# Altium PCB PCB1.PcbDoc
Units mil, origin at the board's own origin, x right, y up, seen from the top; angles counter-clockwise.
Board outline 2000 x 1000 mil, 2 copper layers (Top Layer, Bottom Layer); 12 components, 11 nets, 60 pads, 1 vias.
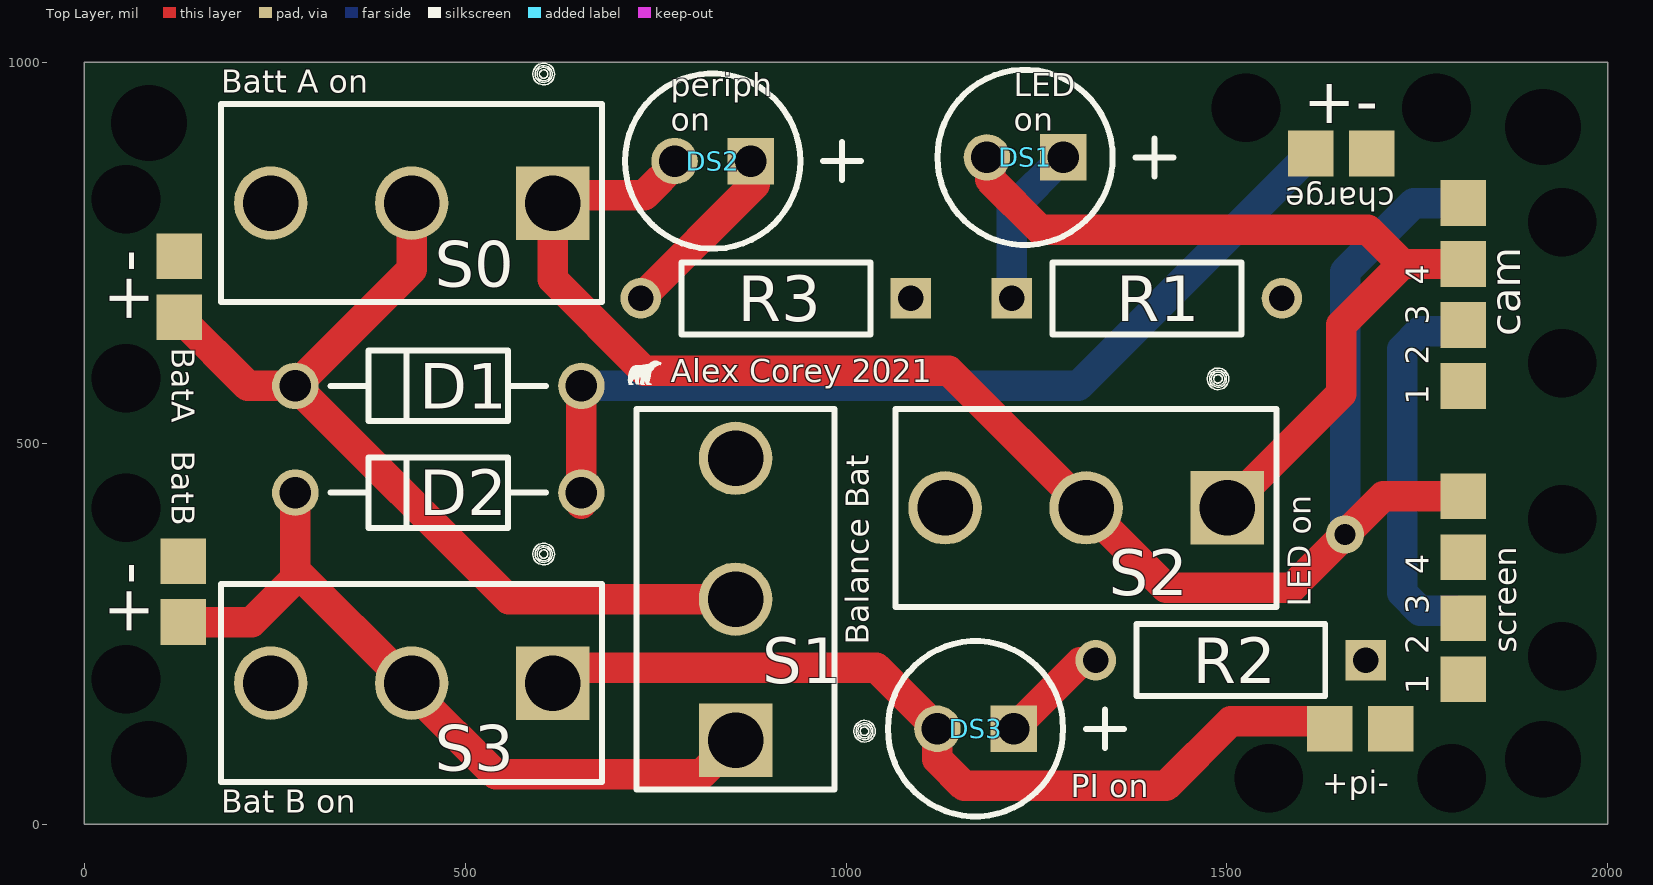
[diagram p0: Top Layer view]
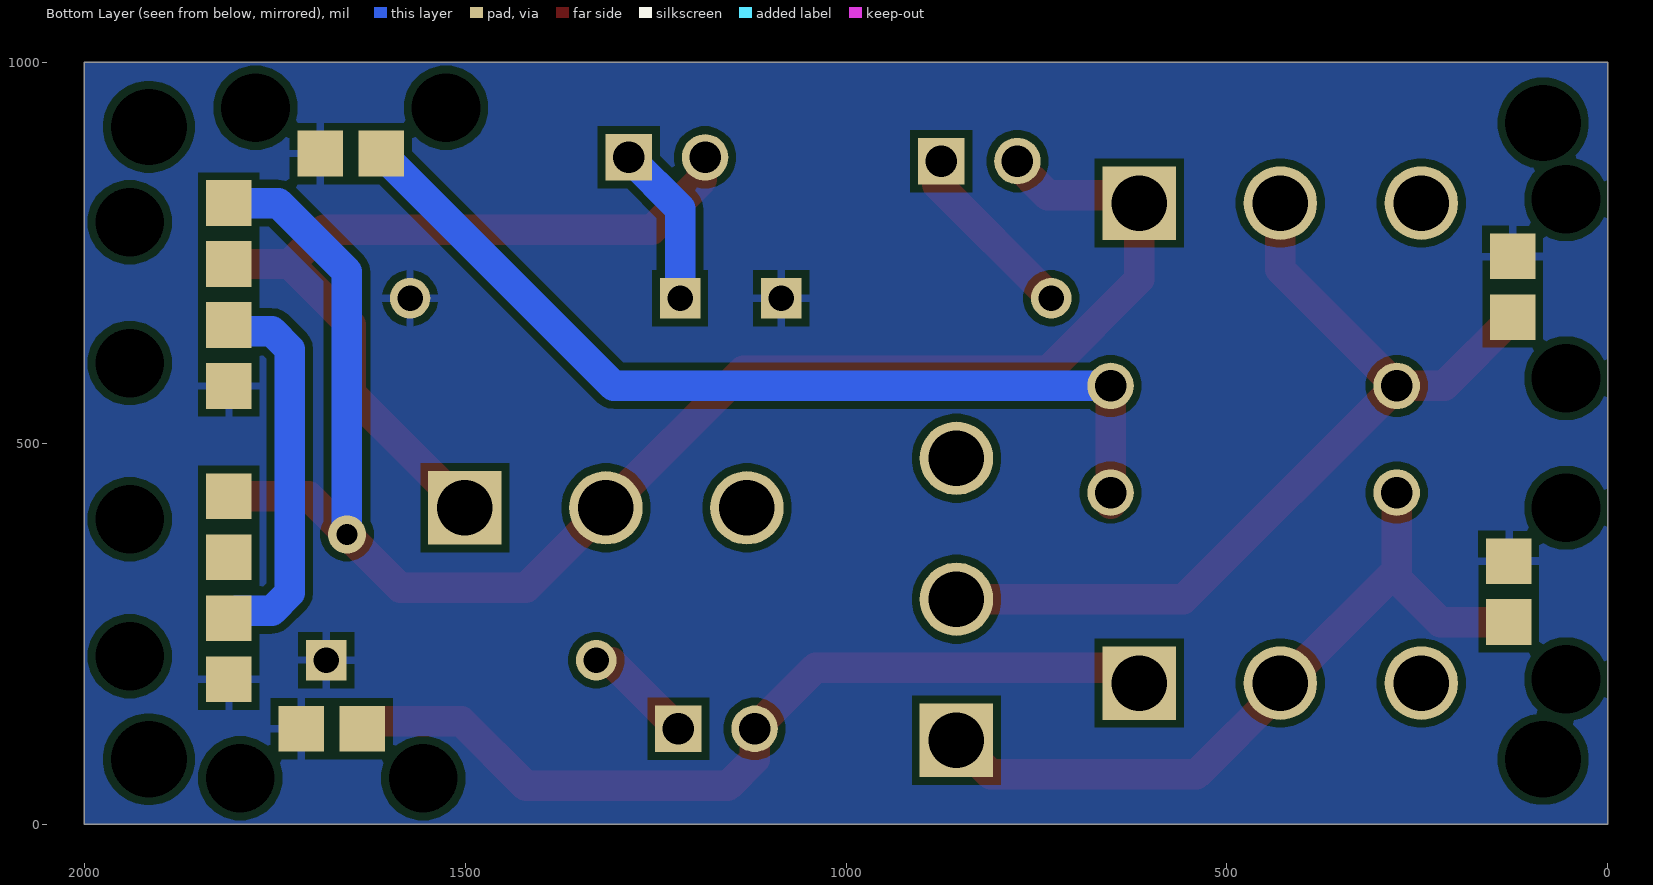
[diagram p1: Bottom Layer view, seen from below]

## Layer stack, top to bottom
Top Solder: solder mask 0.4, Solder Resist, Dk 3.5
Top Layer: signal copper 1.4
Dielectric 1: dielectric 12.6, FR-4, Dk 4.8
Bottom Layer: signal copper 1.4
Bottom Solder: solder mask 0.4, Solder Resist, Dk 3.5

## Board outline
0,0 0,1000 2000,1000 2000,0

## Design rules (kind name [scope] priority, off if disabled: settings)
Clearance [All] p1: gap=10 ignorepadtopadclearanceinfootprint=FALSE except(0: Arc-Hole Track-Hole SMDPad-Hole THPad-Hole Via-Hole Fill-Hole Poly-Hole Region-Hole Text-Hole)
PolygonConnect [All] p1: connectstyle=Relief reliefconductorwidth=10 reliefentries=4 polygonreliefangle="90 Angle" airgapwidth=10
RoutingVias [All] p1: holewidth=28 width=50 viastyle="Through Hole" minholewidth=28 minwidth=50 maxholewidth=28 maxwidth=50
SolderMaskExpansion [All] p1: expansion=4 istentingtop=FALSE
Width [All] p1: maxlimit=40 minlimit=10 preferedwidth=20
30 further rules are at their usual default settings.

## Components (designator, comment, footprint, x,y, rotation, side; value= is the part's Value field where it differs from the comment)
D1 "1N4001" ONSC-AXIAL_LEAD-2-59-10_P 465,575 r0 top
D2 "1N4001" ONSC-AXIAL_LEAD-2-59-10_P 465,435 r0 top
DS1 "HLMP-3301" AVAG-HLMP-3301-2 1285,875 r180 top
DS2 "HLMP-3301" AVAG-HLMP-3301-2 875,870 r180 top
DS3 "HLMP-3301" AVAG-HLMP-3301-2 1220,125 r180 top
R1 "MFR-25FBF52-1K" RESA60-630X240 1395,690 r0 top
R2 "MFR-25FBF52-1K" RESA60-630X240 1505,215 r180 top
R3 "MFR-25FBF52-1K" RESA60-630X240 907.83,690 r180 top
S0 "1101M2S3CQE2" SW_1101M2S3CQE2 430,815 r270 top (schematic designator S)
S1 "1101M2S3CQE2" SW_1101M2S3CQE2 855,295 r180 top
S2 "1101M2S3CQE2" SW_1101M2S3CQE2 1315.04,415 r270 top
S3 "1101M2S3CQE2" SW_1101M2S3CQE2 430,185 r270 top

## Footprints (in the part's own frame and the unit in brackets; to place one, negate y for a bottom-side part, rotate by r counter-clockwise, add the part's x,y. Pads: shape width x height; smd on the part's side, far side on the other; paste and mask are expansions set on the pad)
AVAG-HLMP-3301-2 [mm] "THD, 2-Leads, Body Dia 5.85mm"
  rect 1.55x1.55 hole 1.05: 1(0,0)
  round 1.55 hole 1.05: 2(2.54,0)
  silkscreen extent -3.68,-2.92 4.19,2.92
ONSC-AXIAL_LEAD-2-59-10_P [mm] "AXIAL, 2-Leads, Diameter 2.35mm"
  round 1.55 hole 1.05: 1(-4.77,0) 2(4.77,0)
  silkscreen extent -3.59,-1.17 3.59,1.17
RESA60-630X240 [mm] "Axial Resistor, 2-Leads, Dia 2.4mm, Body Length 6.3mm"
  rect 1.35x1.35 hole 0.85: 1(-4.5,0)
  round 1.35 hole 0.85: 2(4.5,0)
  silkscreen extent -3.15,-1.2 3.15,1.2, body extent -3.15,-1.2 3.15,1.2, height 2.4
SW_1101M2S3CQE2 [mm]
  rect 2.45x2.45 hole 1.85: 1(0,4.7)
  round 2.45 hole 1.85: 2(0,0) 3(0,-4.7)
  silkscreen extent -4.66,-6.35 3.3,6.35

## Part data
D1 D2: library part CMP-0902-00117-1, "Standard Recovery Rectifier, 2-Pin Axial_Lead, Pb-Free, Bulk Bag", Manufacturer="On Semiconductor", ComponentLink1Description="Manufacturer URL", ComponentLink1URL=http://www.onsemi.com/, ComponentLink2Description=Datasheet, ComponentLink2URL=http://www.onsemi.com/pub_link/Collateral/1N4001-D.PDF, ComponentLink3Description="Package Specification", ComponentLink3URL=http://www.onsemi.cn/pub_link/Collateral/59-10.PDF, DatasheetVersion="Rev. 13", IFSM Max (A)=30, IO(rec) Max (A)=1, Mounting Technology="Through Hole", PackageDescription="2-Pin, Axial Lead, Diameter 2.35 mm", PackageReference=AXIAL_LEAD-2-59-10, PackageVersion="Rev. U, 02/2005", Packing="Bulk Bag", PartNumber=1N4001, RoHS=TRUE, Type="Standard Recovery", VRRM Max (V)=50
DS1 DS2 DS3: library part CMP-2000-06411-1, "T-1 3/4 (5 mm) Diffused LED Lamp, 1.9 V, -40 to 100 degC, 2-Pin THD, RoHS, Bulk", Emitting Color=Red, Forward Current=25mA, Forward Voltage=2.4V, Manufacturer=Avago, Operating Temp Range=-40Cto100C, Operating Temperature Classification=Industrial, Package Description="2-Pin Through Hole LED, Dia 5.85 mm", Package Type=T-13/4, Power Dissipation=85W, Reverse Voltage=5V, Test Current (It)=10mA, Chip Material=GaP, Datasheet URL=http://www.avagotech.com/docs/AV02-1558EN, Datasheet Version=03/2015, DELETED=Compliant, Dominant Wave Length=626nm, High Brightness=No, Lens Dimensions=5.08x5.08x8.3mm, Lens Type=ColoredDiffused, Lum Intensity=5.4mcd, Luminous Intensity=5.4mcd, Main Category=StandardLED, Manufacturer URL=http://www.avagotech.com/, Mounting=ThroughHole, Mounting Technology=ThroughHole, Number of  Elements=1, Package Reference=HLMP-3301, Packaging=TapeandReel, Peak Wavelength=635nm, Pin Count=2, Product Depth (mm)=6.1mm, Product Height (mm)=9.19mm, Product Length (mm)=6.1mm, Rad Hardened=No, Shape Type=Circular, Type=Uni-Color, Viewing Angle=60deg
R1 R2 R3: library part CMP-1659-00075-1, "Axial Resistor, 1 KOhm, +/- 1%, 250 mW, -55 to 155 degC, 2-Pin THD, RoHS, Bulk", Case\Package=Axial, Max Operating Temperature="155 degC", Min Operating Temperature="-55 degC", Package Quantity=200, Power Rating="250 mW", Resistance="10 kohm", Tolerance=1%, Voltage Rating="250 V", ComponentLink1Description="Manufacturer URL", ComponentLink1URL=http://www.yageo.com/, ComponentLink2Description=Datasheet, ComponentLink2URL=http://www.yageo.com/documents/recent/Yageo%20LR_MFR_2013.pdf, DatasheetVersion=Apr-13, Length="0.248 inch", PackageDescription="2-Pin Axial Lead, Dia 2.4 mm, Body Length 6.3 mm", PackageReference=MFR-25, Packaging=Bulk, RoHSCompliant=true
S0 S1 S2 S3: "Slide Switch SPDT Through Hole", Package=None, Digi-Key_Part_Number=CKN5001-ND, Digi-Key_Purchase_URL=https://www.digikey.fr/product-detail/en/c-k/1101M2S3CQE2/CKN5001-ND/67042?utm_source=snapeda&utm_medium=aggregator&utm_campaign=symbol, MF=C&K, MP=1101M2S3CQE2, SnapEDA_Link=https://www.snapeda.com/parts/1101M2S3CQE2/C%26K/view-part/287375/?ref=snap

## Free pads (board coordinates)
  rect 60x60 all layers, no hole: 26(125,665) 26(130,265) 26(1610,880) 26(1635,125) 26(1810,430) 26(1810,815) 27(125,745) 27(130,345) 27(1690,880) 27(1715,125) 27(1810,190) 27(1810,575) 27(1810,735) white(1810,350) yellow(1810,270) yellow(1810,655)
  round 60 hole 100: 28(85,85) 28(85,920) 28(1915,85) 28(1915,915)
  round 60 hole 90: 29(55,190) 29(55,415) 29(55,585) 29(55,820) 29(1525,940) 29(1555,60) 29(1775,940) 29(1795,60) 29(1940,220) 29(1940,400) 29(1940,605) 29(1940,790)

## Via types
v1: diameter 50, hole 28, Top Layer to Bottom Layer, 1 vias

## Nets (pads, with @x,y where several pads share a name; then routed paths per layer and width w, separated by ;. In a path a pad name is that pad's centre, name@x,y a point inside that pad or via, vN(x,y) a via of type N, cw(c..) or ccw(c..) an arc to the next point about the centre after c; other vN are vias at no path point)
GND: pad.27@125,745 pad.27@130,345 pad.27@1690,880 pad.27@1715,125 pad.27@1810,190 pad.27@1810,575 R1.2 R2.1 R3.1
NetD1_1: D1.1 pad.26@125,665 S0.2 S1.2 | length 1196.5
  Top Layer w40: pad.26@125,665 215,575 D1.1 ; S0.2@430,825 430,727.8 D1.1 ; S1.2 557.2,295 D1.1
NetD1_2: D1.2 D2.2 pad.26@1610,880 | length 1238.5
  Top Layer w40: D2.2@652.8,420 D1.2
  Bottom Layer w40: D1.2 1305,575 pad.26@1610,880
NetD2_1: D2.1 pad.26@130,265 S1.1 S3.2 | length 970.2
  Top Layer w40: pad.26@130,265 220,265 280.02,325.02 ; 277.2,327.83 D2.1@277.2,420 ; 277.2,332.8 425,185 S3.2 ; S3.2@430.04,175 540.04,65 810.04,65 S1.1
NetDS1_1: DS1.1 R1.1 | length 215.9
  Bottom Layer w40: R1.1@1220,692.17 R1.1 1217.83,807.83 DS1.1
NetDS1_2: DS1.2 pad.27@1810,735 S2.1 | length 1112.9
  Top Layer w40: DS1.2 1189.02,870.98 1189.02,845.98 1255,780 1685,780 1730,735 ; S2.1 1650,564.92 1650,655 1730,735 ; pad.27@1810,735 1730,735
NetDS2_1: DS2.1 R3.2 | length 241.9
  Top Layer w40: R3.2 880,839.33 DS2.1@880,870
NetDS2_2: DS2.2 pad.26@1810,430 pad.26@1810,815 S0.1 S2.2 | length 2243.3
  Top Layer w40: DS2.2@780,870 735,825 615.04,825 615.04,714.96 735,595 1135.04,595 S2.2 ; S2.2 1420,310 1585,310 1705,430 pad.26@1810,430
  Bottom Layer w40: v1(1655,380) 1655,725 1745,815 pad.26@1810,815
NetDS3_1: DS3.1 R2.2 | length 145.1
  Top Layer w40: DS3.1 1307.48,212.48 1325.32,212.48 R2.2
NetDS3_2: DS3.2 pad.26@1635,125 S3.1 | length 1159.3
  Top Layer w40: S3.1@615.08,175 645.08,205 1040,205 DS3.2 1120,85 1155,50 1420,50 1505,135 1625,135 pad.26@1635,125
yellow: pad.yellow | length 506.8
  Bottom Layer w40: pad.yellow@1810,270 1800,280 1753.43,280 1730,303.43 1730,623.28 1753.43,646.72 1801.72,646.72 pad.yellow@1810,655
pads on no net: S0.3 S1.3 S2.3 S3.3

## Polygon pours and split planes (outlines as drawn)
GND on Bottom Layer "NONET_L-01_P-001" (solid, pour order 0): 0,1000 2000,1000 2000,0 0,0

## Silkscreen, mask and mechanical layers (free items; w line width, h text height)
Top Overlay:
  region: 1613 vertices and 1 holes, not listed, extent 713.82,576.41 757.41,607.94
  text "Batt A on" at 180,960 h30
  text "+-" at 1600,920 h60
  text "periph / on" at 770.07,910 h30
  text "LED / on" at 1220.05,910 h30
  text "charge" at 1720,835 h30 r180
  text "+-" at 85,655 h60 r90
  text "cam" at 1885,640 h40 r90
  text "BatA" at 115,625 h30 r270
  text "Alex Corey 2021" at 770,580 h30
  text "1  2  3  4" at 1765,550 h30 r90
  text "BatB" at 115,490 h30 r270
  text "LED on" at 1610,285 h30 r90
  text "+-" at 85,245 h60 r90
  text "Balance Bat" at 1030,235 h30 r90
  text "screen" at 1880,225 h30 r90
  text "1  2  3  4" at 1765,170 h30 r90
  text "+pi-" at 1625,40 h30
  text "PI on" at 1295,35 h30
  text "Bat B on" at 180,15 h30
Mechanical 1:
  the board outline again, w10
Mechanical 5:
  drawing of 3450 lines, arcs and shapes, not listed